# Altium PCB 1815C.PcbDoc
Units mm, origin at the board's own origin, x right, y up, seen from the top; angles counter-clockwise.
Board outline 170 x 100 mm, 2 copper layers (Top Layer, Bottom Layer), stack 1.586 mm thick; 85 components, 65 nets, 436 pads, 91 vias.
Unrouted connection lines stored in the file: 1.
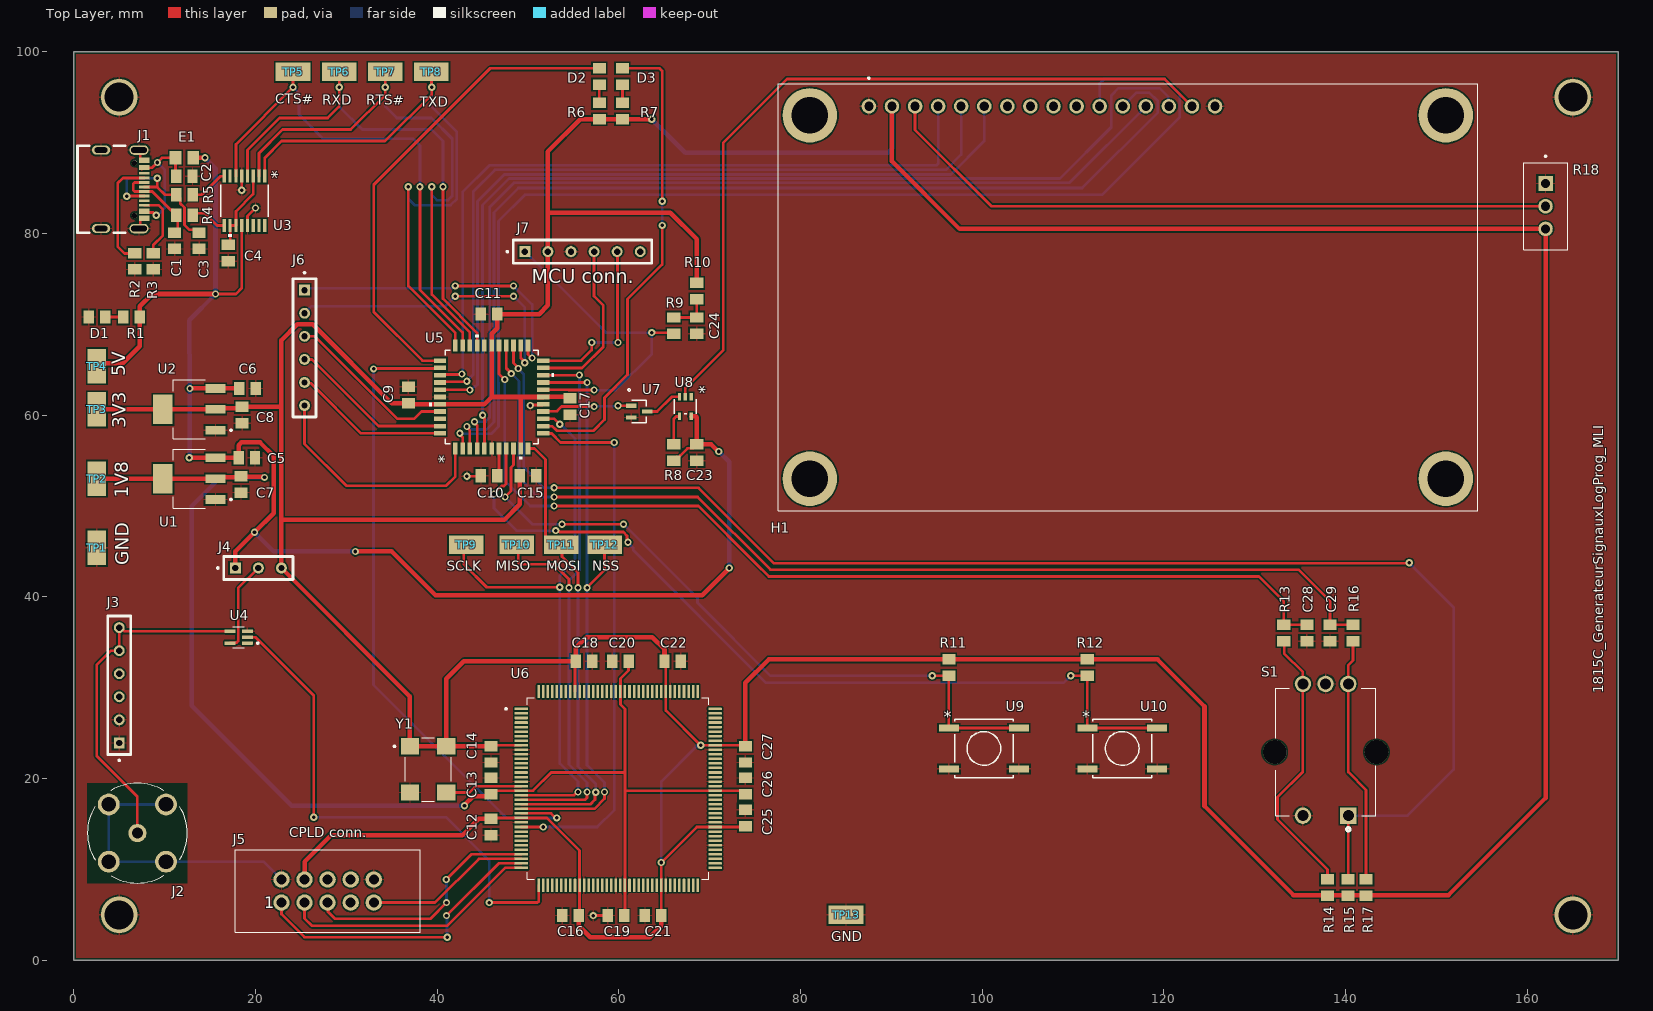
[diagram p0: Top Layer view]
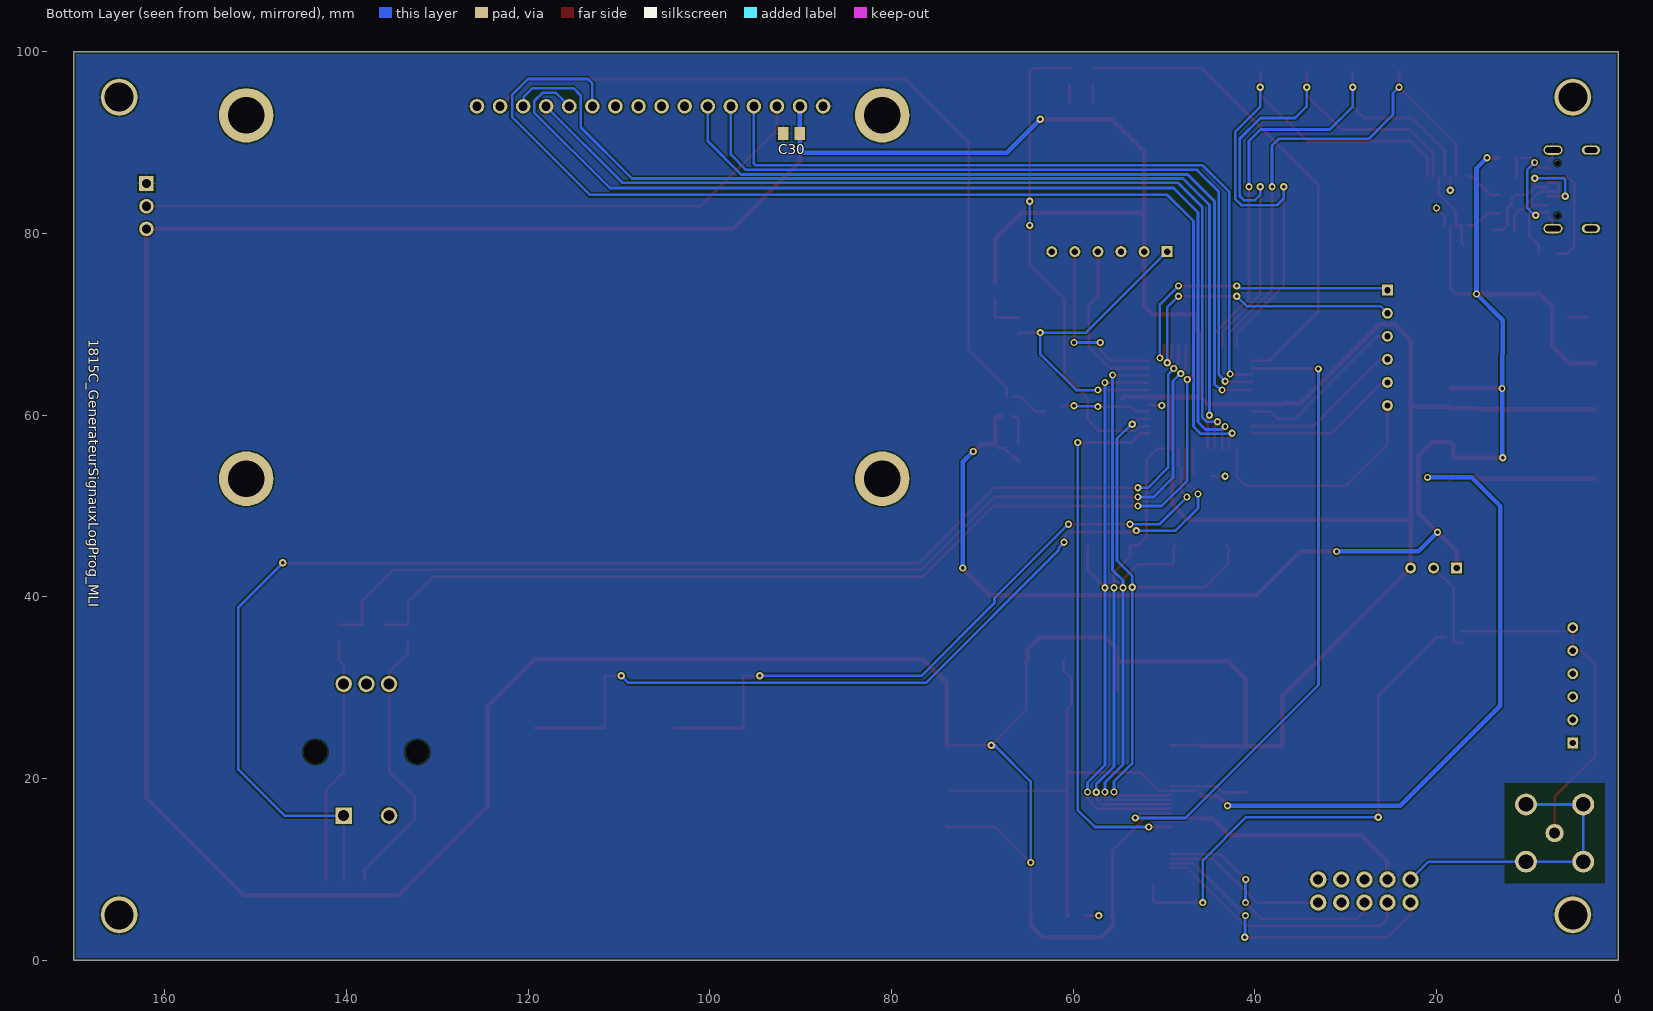
[diagram p1: Bottom Layer view, seen from below]
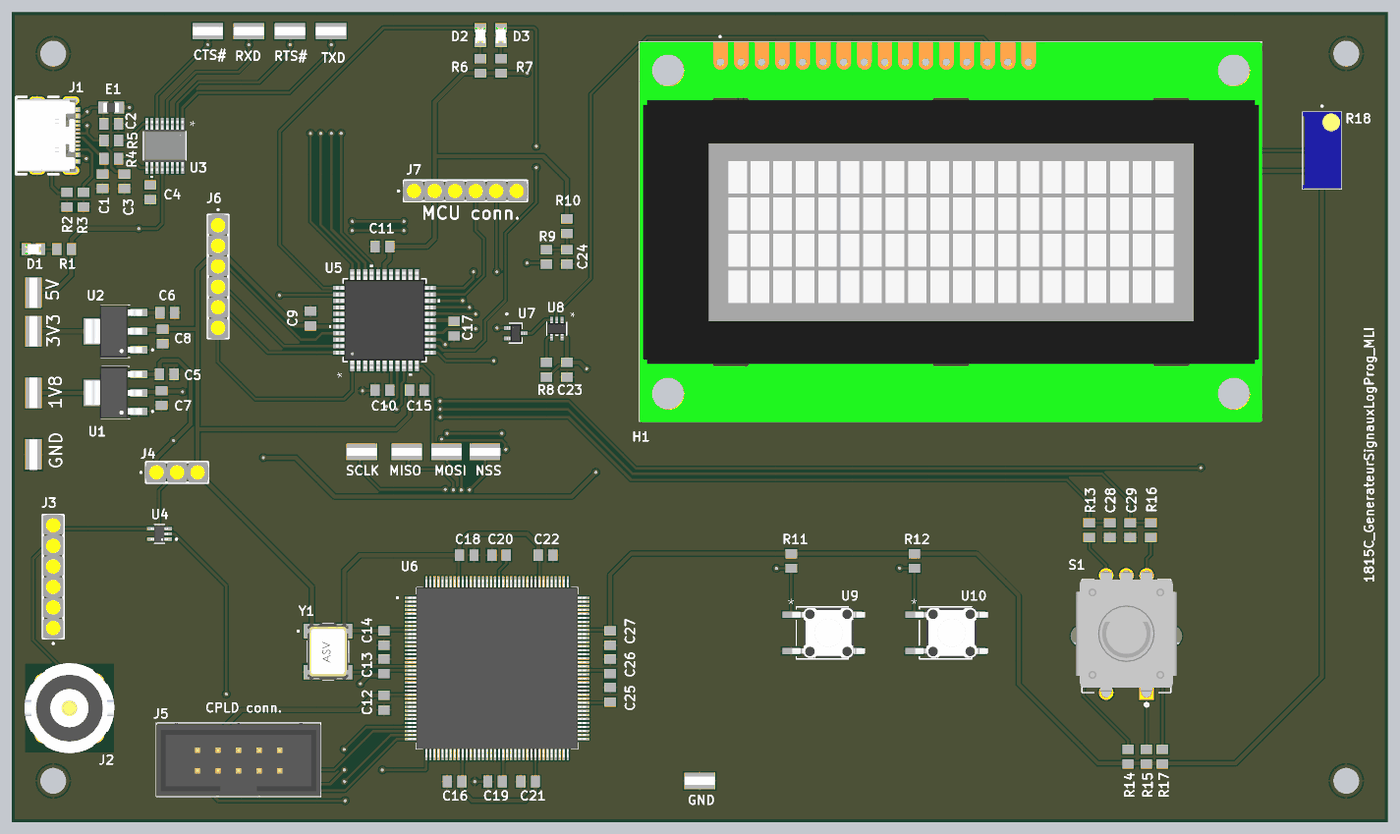
[diagram p2: 3D render of the assembled board from above, using the file's embedded part models]

## Layer stack, top to bottom
Top Solder: solder mask 0.0102, Solder Resist, Dk 3.5
Top Layer: signal copper 0.018
Dielectric1: core 1.55, FR-4, Dk 4.8
Bottom Layer: signal copper 0.018
Bottom Solder: solder mask 0.0102, Solder Resist, Dk 3.5

## Board outline
0,0 0,100 170,100 170,0

## Design rules (kind name [scope] priority, off if disabled: settings)
BoardOutlineClearance [All] p1: gap=0.25 ignorepadtopadclearanceinfootprint=FALSE except(0: Arc-SplitContinuation Track-SplitContinuation SMDPad-SplitContinuation THPad-SplitContinuation Via-SplitContinuation Fill-SplitContinuation Poly-SplitContinuation Region-SplitContinuation Text-SplitContinuation)
Clearance Clearance-xPP-xTP-xTT [All] p1: gap=0.16 ignorepadtopadclearanceinfootprint=FALSE
ComponentClearance [All] p1: gap=0.25 collisioncheckmode=3 verticalgap=0.25 showdistances=FALSE
DiffPairsRouting [All] p1: maxlimit=0.25 minlimit=0.25 mostfreqgap=0.25 toplayer_minwidth=0.3 toplayer_maxwidth=0.3 toplayer_prefwidth=0.3 bottomlayer_minwidth=0.3 bottomlayer_maxwidth=0.3 bottomlayer_prefwidth=0.3 maxuncoupledlength=12.5
Height [All] p1: minheight=0 maxheight=25 prefheight=12.5
HoleSize HoleSize-PTH [All] p1: absolutevalues=TRUE maxlimit=10 minlimit=0.25 maxpercent=80.000 minpercent=20.000
HoleToHoleClearance [All] p1: gap=0.35 allowstackedmicrovias=TRUE
MinimumAnnularRing "Minimum IAR  >0.45mm" [((ObjectKind = 'Pad') OR (ObjectKind = 'Via')) And (Layer = 'MultiLayer') And (HoleDiameter > AsMM(0.45))] p1: minimumring=0.175 // minimum inner annular ring for pads > 0.45mm finished hole size
MinimumSolderMaskSliver [All] p1: minsoldermaskwidth=0.08
PasteMaskExpansion [All] p1: expansion=-0.025
PlaneClearance PlaneClearance-IPI [All] p1: clearance=0.25
PlaneConnect [All] p1: planeconnectstyle=Relief reliefexpansion=0.175 reliefentries=4 reliefconductorwidth=0.2 reliefairgap=0.2
PolygonConnect PolygonConnect-xTW [All] p1: connectstyle=Relief reliefconductorwidth=0.2 reliefentries=4 polygonreliefangle="90 Angle" airgapwidth=0.2
RoutingCorners [All] p1: cornerstyle=45-Degree minsetback=2.5 maxsetback=2.5
RoutingVias RoutingViasES [All] p1: holewidth=0.4 width=0.8 viastyle="Through Hole" minholewidth=0.25 minwidth=0.61 maxholewidth=0.5 maxwidth=1 // finishet hole size <= 0.45mm
SilkToSilkClearance [All] p1: silktosilkclearance=0.2
SilkToSolderMaskClearance SilkscreenOverComponentPads [IsPad] p1: minsilkscreentomaskgap=0.2 clearancetoexposedcopper=TRUE
SolderMaskExpansion [All] p1: expansion=0 istentingtop=FALSE
UnRoutedNet [All] p1: checkbadconnections=TRUE
Width Width-xTW [All] p1: maxlimit=1.5 minlimit=0.25 preferedwidth=0.3
17 further rules are at their usual default settings.

## Classes and differential pairs
component class 1815C_USB_Alim: C1 C2 C3 C4 C5 C6 C7 C8 D1 E1 GND J1 R1 R2 R3 R4 R5 TP1 TP2 TP3 TP4 TP5 TP6 TP7 TP8 TP13 U1 U2 U3
component class 1815C_Microcontroleur: C9 C10 C11 C15 C17 C24 D2 D3 J6 J7 R6 R7 R9 R10 U5
component class 1815C_Interface_hardware: C23 C28 C29 C30 H1 R8 R11 R12 R13 R14 R15 R16 R17 R18 S1 U7 U8 U9 U10
component class 1815C_CPLD: C12 C13 C14 C16 C18 C19 C20 C21 C22 C25 C26 C27 J2 J3 J4 J5 TP9 TP10 TP11 TP12 U4 U6 Y1
differential pair FT230: +FT230_P -FT230_N

## Components (designator, comment, footprint, x,y, rotation, side; value= is the part's Value field where it differs from the comment)
C1 "Cap" 0805 11.1,79.2 r90 top value=47pF (schematic designator C4)
C2 "Cap" 0805 12.17,86.294 r180 top value=10nF (schematic designator C1)
C3 "Cap" 0805 13.8,79.2 r90 top value=47pF (schematic designator C5)
C4 "Cap" 0805 17,77.84 r270 top value=100nF (schematic designator C2)
C5 "Cap" 0805 19.05,55.32 r180 top value=22uF (schematic designator C8)
C6 "Cap" 0805 19.113,62.94 r180 top value=22uF
C7 "Cap" 0805 18.397,52.385 r90 top value=22uF (schematic designator C9)
C8 "Cap" 0805 18.53,60.005 r90 top value=22uF (schematic designator C7)
C9 "Cap" 0805 36.83,62.23 r270 top value=100nF (schematic designator C17)
C10 "Cap" 0805 45.72,53.34 r0 top value=10uF (schematic designator C18)
C11 "Cap" 0805 45.72,71.12 r0 top value=100nF (schematic designator C16)
C12 "Cap" 0805 45.92,14.67 r90 top value=100nF (schematic designator C25)
C13 "Cap" 0805 45.92,19.17 r270 top value=100nF (schematic designator C22)
C14 "Cap" 0805 45.92,22.67 r90 top value=100nF (schematic designator C26)
C15 "Cap" 0805 50,53.34 r180 top value=100nF (schematic designator C14)
C16 "Cap" 0805 54.67,4.92 r0 top value=100nF (schematic designator C29)
C17 "Cap" 0805 54.61,60.96 r90 top value=100nF (schematic designator C15)
C18 "Cap" 0805 56.17,32.92 r180 top value=100nF (schematic designator C23)
C19 "Cap" 0805 59.67,4.92 r0 top value=100nF
C20 "Cap" 0805 60.17,32.92 r0 top value=100nF (schematic designator C21)
C21 "Cap" 0805 63.77,4.92 r0 top value=100nF (schematic designator C30)
C22 "Cap" 0805 65.92,32.92 r180 top value=100nF (schematic designator C24)
C23 "Cap" 0805 68.58,55.88 r90 top value=100nF (schematic designator C31)
C24 "Cap" 0805 68.58,69.85 r90 top value=100nF (schematic designator C13)
C25 "Cap" 0805 73.92,15.67 r270 top value=100nF (schematic designator C28)
C26 "Cap" 0805 73.92,19.17 r270 top value=100nF (schematic designator C20)
C27 "Cap" 0805 73.92,22.67 r90 top value=100nF
C28 "Cap" 0805 135.73,36.02 r270 top value=10nF (schematic designator C11)
C29 "Cap" 0805 138.27,36.02 r270 top value=10nF (schematic designator C12)
C30 "Cap" 0805 91,91 r180 bottom value=100nF (schematic designator C10)
D1 "150080RS75000" "0805 - LED" 2.54,70.8 r0 top
D2 "150080RS75000" "0805 - LED" 57.85,97.29 r270 top
D3 "150080RS75000" "0805 - LED" 60.39,97.29 r270 top
E1 "MI0805K601R-10" FB_MI0805K601R-10 12.17,88.326 r0 top
H1 "NHD-0420AZ-FSW-GBW-33V3" NHD0420AZFSWGBW33V3 87.52,94 r0 top
J1 "CONN RCP USB2.0 TYP C" GCT_USB4105-GF-A 3,84.865 r270 top
J2 "CONBNC001" LINX_CONBNC001 7,14 r0 top (schematic designator J6)
J3 "Berg 6" SAMTEC_TS-106-G-A 5,30.27 r90 top (schematic designator J7)
J4 "Berg 3" SAMTEC_TS-103-G-A 20.32,43.18 r0 top (schematic designator J5)
J5 "61201021621" 61201021621 27.94,7.62 r0 top (schematic designator J4)
J6 "Berg 6" SAMTEC_TS-106-G-A 25.4,67.41 r270 top (schematic designator J3)
J7 "Berg 6" SAMTEC_TS-106-G-A 56,78 r0 top (schematic designator J2)
R1 "Res2" 0805 6.35,70.8 r0 top value=220R (schematic designator R5)
R2 "Res2" 0805 6.713,76.94 r90 top value=5k1 (schematic designator R4)
R3 "Res2" 0805 8.749,76.94 r90 top value=5k1
R4 "Res2" 0805 12.177,82.007 r180 top value=27R (schematic designator R2)
R5 "Res2" 0805 12.192,84.262 r180 top value=27R (schematic designator R1)
R6 "Res2" 0805 57.85,93.48 r270 top value=100R (schematic designator R17)
R7 "Res2" 0805 60.39,93.48 r270 top value=100R (schematic designator R18)
R8 "Res2" 0805 66.04,55.88 r90 top value=39R
R9 "Res2" 0805 66.04,69.85 r90 top value=1k (schematic designator R16)
R10 "Res2" 0805 68.58,73.66 r90 top value=10k (schematic designator R15)
R11 "Res2" 0805 96.322,32.21 r270 top value=10k (schematic designator R6)
R12 "Res2" 0805 111.562,32.21 r270 top value=10k (schematic designator R7)
R13 "Res2" 0805 133.19,36.02 r90 top value=10k (schematic designator R14)
R14 "Res2" 0805 138,8 r90 top value=10k (schematic designator R12)
R15 "Res2" 0805 140.25,8 r90 top value=10k (schematic designator R10)
R16 "Res2" 0805 140.81,36.02 r90 top value=10k (schematic designator R13)
R17 "Res2" 0805 142.25,8 r90 top value=10k (schematic designator R11)
R18 "PV36W103C01B00" TRIM_PV36W103C01B00 162,83 r270 top value=10k (schematic designator R9)
S1 "PEC12R-4025F-S0024" ENC_PEC12R-4025F-S0024 137.79,22.92 r270 top
TP1 "5019" KEYSTONE_5019 2.54,45.4 r90 top (schematic designator TP7)
TP2 "5019" KEYSTONE_5019 2.54,53.02 r90 top (schematic designator TP9)
TP3 "5019" KEYSTONE_5019 2.54,60.64 r90 top (schematic designator TP6)
TP4 "5019" KEYSTONE_5019 2.54,65.405 r90 top (schematic designator TP5)
TP5 "5019" KEYSTONE_5019 24.13,97.79 r0 top (schematic designator TP4)
TP6 "5019" KEYSTONE_5019 29.21,97.79 r0 top (schematic designator TP1)
TP7 "5019" KEYSTONE_5019 34.29,97.79 r0 top (schematic designator TP3)
TP8 "5019" KEYSTONE_5019 39.37,97.79 r0 top (schematic designator TP2)
TP9 "5019" KEYSTONE_5019 43.18,45.72 r180 top (schematic designator TP10)
TP10 "5019" KEYSTONE_5019 48.75,45.72 r180 top (schematic designator TP11)
TP11 "5019" KEYSTONE_5019 53.67,45.72 r180 top (schematic designator TP12)
TP12 "5019" KEYSTONE_5019 58.42,45.72 r180 top (schematic designator TP13)
TP13 "5019" KEYSTONE_5019 85,5 r180 top (schematic designator TP8)
U1 "1V8" VREG_LM1117MPX 12.7,53.02 r180 top (schematic designator U3)
U2 "3V3" VREG_LM1117MPX 12.7,60.64 r180 top
U3 "FT230X" SOIC_30XS-R_FTD 18.796,83.591 r270 top (schematic designator U1)
U4 "SN74LV1T34DCKR" SOT65P210X110-5N 18.15,35.56 r180 top (schematic designator U10)
U5 "PIC32MX230F256D-I/PT" TQFP44_PT_MCH 46,62 r90 top (schematic designator U8)
U6 "5M1270ZT144C5N" QFP50P2200X2200X160-144N 59.92,18.92 r0 top (schematic designator U9)
U7 "PDTC124XU,115" SOT323_NXP 62.23,60.4 r270 top (schematic designator U6)
U8 "PSSI2021SAY,115" SOT353_NXP 67.31,60.96 r270 top (schematic designator U5)
U9 "SWITCH TACTILE SPST-NO 0.05A 12V" SOIC_82043816_WRE 100.17,23.32 r0 top (schematic designator U4)
U10 "SWITCH TACTILE SPST-NO 0.05A 12V" SOIC_82043816_WRE 115.41,23.32 r0 top (schematic designator U7)
Y1 "ASV50000MHZEJT" XTAL_ASV50000MHZEJT 39,21 r0 top

## Footprints (in the part's own frame and the unit in brackets; to place one, negate y for a bottom-side part, rotate by r counter-clockwise, add the part's x,y. Pads: shape width x height; smd on the part's side, far side on the other; paste and mask are expansions set on the pad)
0805 [mm]
  rect 1.15x1.45 smd: 1(-0.9,0) 2(0.9,0)
  body extent -1.01,-0.6 0.99,0.6, height 1.35
"0805 - LED" [mm]
  rect 1.15x1.45 smd: 1(-0.9,0) 2(0.9,0)
  body extent -1,-0.63 1,0.63, height 0.7
61201021621 [mm]
  round 1.8 hole 1.1: 1(-5.08,-1.27) 2(-5.08,1.27) 3(-2.54,-1.27) 4(-2.54,1.27) 5(0,-1.27) 6(0,1.27) 7(2.54,-1.27) 8(2.54,1.27) 9(5.08,-1.27) 10(5.08,1.27)
  silkscreen extent -10.18,-4.55 10.18,4.55, body extent -10.18,-4.53 10.18,4.57, height 9.1
ENC_PEC12R-4025F-S0024 [mm]
  rect 1.8x1.8 hole 1.2: 1(7,2.5)
  round 1.8 hole 1.2: 2(7,-2.5) A(-7.5,2.5) B(-7.5,-2.5) C(-7.5,0)
  round 2.6 hole 2.6 unplated: ""(0,5.6) ""(0,-5.6)
  silkscreen extent -7,-5.5 8.7,5.5, body extent -7.89,-7 6.86,7, height 20
FB_MI0805K601R-10 [mm]
  rect 1.285x1.47 smd: 1(-0.973,0) 2(0.973,0)
  body extent -1,-0.63 1,0.63, height 1.1
GCT_USB4105-GF-A [mm]
  rect 0.6x1.15 smd: A1_B12(-3.2,4.755) A4_B9(-2.4,4.755) B1_A12(3.2,4.755) B4_A9(2.4,4.755)
  rect 0.3x1.15 smd: A5(-1.25,4.755) A6(-0.25,4.755) A7(0.25,4.755) A8(1.25,4.755) B5(1.75,4.755) B6(0.75,4.755) B7(-0.75,4.755) B8(-1.75,4.755)
  oval 1.05x2.1 hole 0.6 slot 1.7 at 90 deg: S1(-4.32,4.18) S4(4.32,4.18)
  oval 1x2 hole 0.6 slot 1.4 at 90 deg: S2(-4.32,0) S3(4.32,0)
  round 0.6 hole 0.6 unplated: ""(-2.89,3.68) ""(2.89,3.68)
  silkscreen extent -4.79,-2.6 4.79,2.65, body extent -4.47,-2.59 4.47,5.11, height 3.26
KEYSTONE_5019 [mm]
  rect 3.8x2.03 smd: TP(0,0)
  body extent -1.91,-1.01 1.91,1.01, height 1.14
LINX_CONBNC001 [mm]
  round 2 hole 1.2: 1(0,0)
  round 2.4 hole 1.6: 2(-3.15,-3.15) 2(-3.15,3.15) 2(3.15,-3.15) 2(3.15,3.15)
  silkscreen extent -5.5,-5.5 5.5,5.5, body extent -5.5,-5.5 5.5,5.5, height 13.9
NHD0420AZFSWGBW33V3 [mm]
  round 1.6 hole 1: 1(0,0) 2(2.54,0) 3(5.08,0) 4(7.62,0) 5(10.16,0) 6(12.7,0) 7(15.24,0) 8(17.78,0) 9(20.32,0) 10(22.86,0) 11(25.4,0) 12(27.94,0) 13(30.48,0) 14(33.02,0) 15(35.56,0) 16(38.1,0)
  round 6 hole 4: MH1(-6.5,-1) MH2(-6.5,-41) MH3(63.5,-41) MH4(63.5,-1)
  silkscreen extent -10,-44.5 67,3.2, body extent -9.93,-44.59 67.08,2.41, height 11.1
QFP50P2200X2200X160-144N [mm]
  rrect25% 1.47x0.28 smd: 1(-10.67,8.75) 2(-10.67,8.25) 3(-10.67,7.75) 4(-10.67,7.25) 5(-10.67,6.75) 6(-10.67,6.25) 7(-10.67,5.75) 8(-10.67,5.25) 9(-10.67,4.75) 10(-10.67,4.25) 11(-10.67,3.75) 12(-10.67,3.25) 13(-10.67,2.75) 14(-10.67,2.25) 15(-10.67,1.75) 16(-10.67,1.25) 17(-10.67,0.75) 18(-10.67,0.25) 19(-10.67,-0.25) 20(-10.67,-0.75) 21(-10.67,-1.25) 22(-10.67,-1.75) 23(-10.67,-2.25) 24(-10.67,-2.75) 25(-10.67,-3.25) 26(-10.67,-3.75) 27(-10.67,-4.25) 28(-10.67,-4.75) 29(-10.67,-5.25) 30(-10.67,-5.75) 31(-10.67,-6.25) 32(-10.67,-6.75) 33(-10.67,-7.25) 34(-10.67,-7.75) 35(-10.67,-8.25) 36(-10.67,-8.75) 73(10.67,-8.75) 74(10.67,-8.25) 75(10.67,-7.75) 76(10.67,-7.25) 77(10.67,-6.75) 78(10.67,-6.25) 79(10.67,-5.75) 80(10.67,-5.25) 81(10.67,-4.75) 82(10.67,-4.25) 83(10.67,-3.75) 84(10.67,-3.25) 85(10.67,-2.75) 86(10.67,-2.25) 87(10.67,-1.75) 88(10.67,-1.25) 89(10.67,-0.75) 90(10.67,-0.25) 91(10.67,0.25) 92(10.67,0.75) 93(10.67,1.25) 94(10.67,1.75) 95(10.67,2.25) 96(10.67,2.75) 97(10.67,3.25) 98(10.67,3.75) 99(10.67,4.25) 100(10.67,4.75) 101(10.67,5.25) 102(10.67,5.75) 103(10.67,6.25) 104(10.67,6.75) 105(10.67,7.25) 106(10.67,7.75) 107(10.67,8.25) 108(10.67,8.75)
  rrect25% 0.28x1.47 smd: 37(-8.75,-10.67) 38(-8.25,-10.67) 39(-7.75,-10.67) 40(-7.25,-10.67) 41(-6.75,-10.67) 42(-6.25,-10.67) 43(-5.75,-10.67) 44(-5.25,-10.67) 45(-4.75,-10.67) 46(-4.25,-10.67) 47(-3.75,-10.67) 48(-3.25,-10.67) 49(-2.75,-10.67) 50(-2.25,-10.67) 51(-1.75,-10.67) 52(-1.25,-10.67) 53(-0.75,-10.67) 54(-0.25,-10.67) 55(0.25,-10.67) 56(0.75,-10.67) 57(1.25,-10.67) 58(1.75,-10.67) 59(2.25,-10.67) 60(2.75,-10.67) 61(3.25,-10.67) 62(3.75,-10.67) 63(4.25,-10.67) 64(4.75,-10.67) 65(5.25,-10.67) 66(5.75,-10.67) 67(6.25,-10.67) 68(6.75,-10.67) 69(7.25,-10.67) 70(7.75,-10.67) 71(8.25,-10.67) 72(8.75,-10.67) 109(8.75,10.67) 110(8.25,10.67) 111(7.75,10.67) 112(7.25,10.67) 113(6.75,10.67) 114(6.25,10.67) 115(5.75,10.67) 116(5.25,10.67) 117(4.75,10.67) 118(4.25,10.67) 119(3.75,10.67) 120(3.25,10.67) 121(2.75,10.67) 122(2.25,10.67) 123(1.75,10.67) 124(1.25,10.67) 125(0.75,10.67) 126(0.25,10.67) 127(-0.25,10.67) 128(-0.75,10.67) 129(-1.25,10.67) 130(-1.75,10.67) 131(-2.25,10.67) 132(-2.75,10.67) 133(-3.25,10.67) 134(-3.75,10.67) 135(-4.25,10.67) 136(-4.75,10.67) 137(-5.25,10.67) 138(-5.75,10.67) 139(-6.25,10.67) 140(-6.75,10.67) 141(-7.25,10.67) 142(-7.75,10.67) 143(-8.25,10.67) 144(-8.75,10.67)
  silkscreen extent -12.44,-10 10,10, body extent -11,-11 11,11, height 1.6
SAMTEC_TS-103-G-A [mm]
  rect 1.2x1.2 hole 0.7: 1(-2.54,0)
  round 1.2 hole 0.7: 2(0,0) 3(2.54,0)
  silkscreen extent -4.56,-1.27 3.81,1.27, body extent -3.91,-1.27 3.91,1.27, height 8.28
SAMTEC_TS-106-G-A [mm]
  rect 1.2x1.2 hole 0.7: 1(-6.35,0)
  round 1.2 hole 0.7: 2(-3.81,0) 3(-1.27,0) 4(1.27,0) 5(3.81,0) 6(6.35,0)
  silkscreen extent -8.37,-1.27 7.62,1.27, body extent -7.72,-1.27 7.72,1.27, height 8.28
SOIC_30XS-R_FTD [mil]
  rect 57.28x13.97 smd paste+0 mask+0: 1(-107.14,87.5) 2(-107.14,62.5) 3(-107.14,37.5) 4(-107.14,12.5) 5(-107.14,-12.5) 6(-107.14,-37.5) 7(-107.14,-62.5) 8(-107.14,-87.5) 9(107.14,-87.5) 10(107.14,-62.5) 11(107.14,-37.5) 12(107.14,-12.5) 13(107.14,12.5) 14(107.14,37.5) 15(107.14,62.5) 16(107.14,87.5)
  silkscreen extent -69,-104 156,104, body extent -122,-99 122,99, height 69
SOIC_82043816_WRE [mm]
  rect 2.199x0.771 smd paste+0 mask+0: 1(-3.848,2.25) 2(-3.848,-2.25) 3(3.848,2.25) 4(3.848,-2.25)
  silkscreen extent -3.23,-3.23 3.23,3.23, body extent -3.74,-3.1 5.26,3.1, height 4.3
SOT65P210X110-5N [mm]
  rrect25% 1.19x0.4 smd: 1(-0.96,0.65) 2(-0.96,0) 3(-0.96,-0.65) 4(0.96,-0.65) 5(0.96,0.65)
  silkscreen extent -2.2,-1.17 0.63,1.17, body extent -1.05,-1 1.05,1, height 1.1
SOT323_NXP [mil]
  rect 18.36x45.56 smd paste+0 mask+0: 1(-25.59,-34.5) 2(25.59,-34.5) 3(0,34.5)
  silkscreen extent -98,-48 49,32, body extent -44,-44 44,44, height 44
SOT353_NXP [mm]
  rect 0.794x0.355 smd paste+0 mask+0: 1(-1.07,0.65) 2(-1.07,0) 3(-1.07,-0.65) 4(1.07,-0.65) 5(1.07,0.65)
  silkscreen extent -0.8,-1.23 0.8,1.23, body extent -1.12,-1.1 1.12,1.1, height 1.09
TQFP44_PT_MCH [mm]
  rect 1.341x0.507 smd paste+0 mask+0: 1(-5.674,4) 2(-5.674,3.2) 3(-5.674,2.4) 4(-5.674,1.6) 5(-5.674,0.8) 6(-5.674,0) 7(-5.674,-0.8) 8(-5.674,-1.6) 9(-5.674,-2.4) 10(-5.674,-3.2) 11(-5.674,-4) 23(5.674,-4) 24(5.674,-3.2) 25(5.674,-2.4) 26(5.674,-1.6) 27(5.674,-0.8) 28(5.674,0) 29(5.674,0.8) 30(5.674,1.6) 31(5.674,2.4) 32(5.674,3.2) 33(5.674,4)
  rect 0.507x1.341 smd paste+0 mask+0: 12(-4,-5.674) 13(-3.2,-5.674) 14(-2.4,-5.674) 15(-1.6,-5.674) 16(-0.8,-5.674) 17(0,-5.674) 18(0.8,-5.674) 19(1.6,-5.674) 20(2.4,-5.674) 21(3.2,-5.674) 22(4,-5.674) 34(4,5.674) 35(3.2,5.674) 36(2.4,5.674) 37(1.6,5.674) 38(0.8,5.674) 39(0,5.674) 40(-0.8,5.674) 41(-1.6,5.674) 42(-2.4,5.674) 43(-3.2,5.674) 44(-4,5.674)
  silkscreen extent -6.85,-6.85 6.85,6.85, body extent -5.99,-5.99 5.99,5.99, height 1.2
TRIM_PV36W103C01B00 [mm]
  rect 1.6x1.6 hole 1: 1(-2.5,0)
  round 1.6 hole 1: 2(0,0) 3(2.5,0)
  silkscreen extent -5.6,-2.41 4.76,2.42, body extent -4.76,-2.41 4.76,2.42, height 11.55
VREG_LM1117MPX [mm]
  rect 2.15x0.95 smd: 1(-2.9,2.3) 2(-2.9,0) 3(-2.9,-2.3)
  rect 2.15x3.25 smd: 4(2.9,0)
  silkscreen extent -4.7,-3.25 1.75,3.25, body extent -3.3,-3.25 3.7,3.25, height 1.8
XTAL_ASV50000MHZEJT [mm]
  rect 2x1.8 smd: 1(-2,2.54) 2(-2,-2.54) 3(2,-2.54) 4(2,2.54)
  silkscreen extent -3.8,-3.5 2.54,3.5, body extent -2.54,-3.5 2.54,3.5, height 1.81

## Part data
C1 C2 C3 C4 C5 C6 C7 C8 C9 C10 C11 C12 C13 C14 C15 C16 C17 C18 C19 C20 C21 C22 C23 C24 C25 C26 C27 C28 C29 C30: "Capacitor", LatestRevisionDate=17-Jul-2002, LatestRevisionNote="Re-released for DXP Platform.", PackageDescription="Radial Cap, Thru-Hole; 2 Leads; 0.3 in Pin Spacing", PackageReference=RAD-0.3, Published=8-Jun-2000, Publisher="Altium Limited"
D1 D2 D3: library part LED, "LED RED CLEAR 0805 SMD", Supplier Part Number 1=732-4984-1-ND, LatestRevisionDate=08-Jul-2005, LatestRevisionNote="Mech Layer 1 removed.", PackageDescription="LED; 2 Leads", PackageReference=LED-0, Published=8-Jun-2000, Publisher="Altium Limited", Supplier 1=Digi-Key
E1: "600 Ohms @ 100MHz 1 Power Line Ferrite Bead 0805 (2012 Metric) 1.5A 100mOhm", Package="0805 Laird", Supplier Part Number 1=240-2390-1-ND, Availability=Warning, Check_prices=https://www.snapeda.com/parts/MI0805K601R-10/Laird-Signal%20Integrity%20Products/view-part/332699/?ref=eda, MF="Laird-Signal Integrity", MP=MI0805K601R-10, Price=None, Purchase-URL=https://pricing.snapeda.com/search/part/MI0805K601R-10/?ref=eda, SnapEDA_Link=https://www.snapeda.com/parts/MI0805K601R-10/Laird-Signal%20Integrity%20Products/view-part/332699/?ref=snap, Supplier 1=Digi-Key
H1: "LCD Character Display Modules & Accessories STN- GRAY Transfl 77.5 x 47.0", Manufacturer_Name="Newhaven Display", Mouser Part Number=763-0420AZFSWGBW33V3, Supplier Part Number 1=NHD-0420AZ-FSW-GBW-33V3-ND, Allied Price/Stock=https://www.alliedelec.com/newhaven-display-international-nhd-0420az-fsw-gbw-33v3/70518142/, Allied_Number=70518142, Datasheet Link=http://www.newhavendisplay.com/specs/NHD-0420AZ-FSW-GBW-33V3.pdf, Geometry.Height=14.5mm, Manufacturer_Part_Number=NHD-0420AZ-FSW-GBW-33V3, Mouser Price/Stock=https://www.mouser.com/Search/Refine.aspx?Keyword=763-0420AZFSWGBW33V3, Supplier 1=Digi-Key
J1: library part USB4105-GF-A, "USB-C (USB TYPE-C) USB 2.0 Receptacle Connector 24 (16+8 Dummy) Position Surface Mount, Right Angle; Through Hole", Package=None, Supplier Part Number 1=3158113, Availability="In Stock", Check_prices=https://www.snapeda.com/parts/USB4105-GF-A/Global+Connector+Technology/view-part/?ref=eda, MF=GCT, MP=USB4105-GF-A, Price=None, Purchase-URL=https://pricing.snapeda.com/search/part/USB4105-GF-A/?ref=eda, SnapEDA_Link=https://www.snapeda.com/parts/USB4105-GF-A/Global+Connector+Technology/view-part/?ref=snap, Supplier 1="Future Electronics"
J2: "BNC Connector Jack, Female Socket 50Ohm Through Hole Solder", Package=None, Supplier Part Number 1=343-CONBNC001-ND, Availability="In Stock", Check_prices=https://www.snapeda.com/parts/CONBNC001/Linx/view-part/?ref=eda, MF="Linx Technologies Inc.", MP=CONBNC001, Price=None, Purchase-URL=https://pricing.snapeda.com/search/part/CONBNC001/?ref=eda, SnapEDA_Link=https://www.snapeda.com/parts/CONBNC001/Linx/view-part/?ref=snap, Supplier 1=Digi-Key
J3 J6 J7: "Berge 6 pins"
J4: "Berge 3 pins"
J5: "Connector Header Through Hole 10 position 0.100 _2.54mm_", Package=None, Supplier Part Number 1=732-2094-ND, Availability=Unavailable, MF="Wurth Electronics", MP=61201021621, Price=None, SnapEDA_Link=https://www.snapeda.com/parts/61201021621/Wurth%20Electronics%20Inc./view-part/1156232/?ref=snap, Supplier 1=Digi-Key
R1 R2 R3 R4 R5 R6 R7 R8 R9 R10 R11 R12 R13 R14 R15 R16 R17: library part Res, "Resistor", LatestRevisionDate=17-Jul-2002, LatestRevisionNote="Re-released for DXP Platform.", PackageDescription="Axial Device, Thru-Hole; 2 Leads; 0.4 in Pin Spacing", PackageReference=AXIAL-0.4, Published=8-Jun-2000, Publisher="Altium Limited"
R18: library part trimmer, "10 kOhms 0.5W, 1/2W PC Pins Through Hole Trimmer Potentiometer Cermet 25.0 Turn Top Adjustment", Manufacturer_Name=PIHER, Manufacturer_Part_Number=PT10MH01-105A2020, Mouser Part Number=531-PT10MH-1M, Supplier Part Number 1=118-PV36W103C01B00-ND, Datasheet Link=https://componentsearchengine.com/Datasheets/1/PT10MH01-105A2020.pdf, Geometry.Height=12.3mm, Mouser Price/Stock=https://www.mouser.com/Search/Refine.aspx?Keyword=531-PT10MH-1M, Supplier 1=Digi-Key
S1: "Encoder 12mm 0detents 20mm Shft Push Momentry Sw 24 Pulse", Package=None, Supplier Part Number 1=PEC12R-4222F-S0024-ND, Availability=Unavailable, MP=PEC12R-4025F-S0024, Price=None, Supplier 1=Digi-Key
TP1 TP2 TP3 TP4 TP5 TP6 TP7 TP8 TP9 TP10 TP11 TP12 TP13: "SMT Test Point- Mininature-1000 pc Reels", Package=None, Supplier Part Number 1=36-5019CT-ND, Availability="In Stock", MF="Keystone Electronics", MP=5019, Price=None, Purchase-URL=https://pricing.snapeda.com/search/part/5019/?ref=eda, Supplier 1=Digi-Key
U1: library part LM1117MPX-1.8/NOPB, "800-mA 15-V linear voltage regulator 4-SOT-223 0 to 125", Package=None, Supplier Part Number 1=LM1117MPX-1.8/NOPBCT-ND, Availability=Unavailable, MP=LM1117MPX-1.8, Price=None, Supplier 1=Digi-Key
U2: library part LM1117MPX-3.3/NOPB, "800-mA 15-V linear voltage regulator 4-SOT-223 0 to 125", Package="SOT-223-4 Texas Instruments", Supplier Part Number 1=LM1117MPX-3.3/NOPBCT-ND, Digi-Key_Part_Number=LM1117MPX-3.3/NOPBCT-ND, DigiKey-Purchase-URL=https://snapeda.com/shop?store=DigiKey&id=78945, MF="Texas Instruments", Mouser-Purchase-URL=https://snapeda.com/shop?store=Mouser&id=78945, MP=LM1117MPX-3.3/NOPB, SnapEDA_Link=https://www.snapeda.com/parts/LM1117MPX-3.3/NOPB/Texas%20Instruments/view-part/78945/?ref=snap, Supplier 1=Digi-Key, Texas_Instruments-Purchase-URL=https://snapeda.com/shop?store=Texas+Instruments&id=78945
U3: library part FT230XS-R, "USB Pont, USB à UART USB 2.0 UART Interface 16-SSOP", Mfr_Name="FTDI, Future Technology Devices International Ltd", Supplier Part Number 1=7570010P, Digi-Key_Part_Number_1=768-1135-2-ND, Digi-Key_Part_Number_2=768-1135-1-ND, Digi-Key_Part_Number_3=768-1135-6-ND, RefDes=RefDes, Supplier 1=Rs, Type=Type
U4: "Single Power Supply BUFFER Logic Level Shifter (no enable) 5-SC70 -40 to 125", Package="SOT-SC70-5 Texas Instruments", Supplier Part Number 1=296-37177-1-ND, Digi-Key_Part_Number=296-37177-1-ND, MF="Texas Instruments", MP=SN74LV1T34DCKR, SnapEDA_Link=https://www.snapeda.com/parts/SN74LV1T34DCKR/Texas%20Instruments/view-part/424277/?ref=snap, Supplier 1=Digi-Key, Texas_Instruments-Purchase-URL=https://snapeda.com/shop?store=Texas+Instruments&id=424277
U5: "MIPS32® M4K™ PIC® 32MX Microcontroller IC 32-Bit Single-Core 40MHz 256KB (256K x 8) FLASH 44-TQFP (10x10)", Mfr_Name=Microchip, Supplier Part Number 1=PIC32MX230F256D-I/PT-ND, RefDes=RefDes, Supplier 1=Digi-Key, Type=Type
U6: "IC CPLD 980MC 6.2NS 144TQFP", Package="TQFP-144 Altera", Supplier Part Number 1=544-2840-ND, Availability="In Stock", Check_prices=https://www.snapeda.com/parts/5M1270ZT144C5N/Intel/view-part/?ref=eda, MF=Intel, MP=5M1270ZT144C5N, Price=None, Purchase-URL=https://pricing.snapeda.com/search/part/5M1270ZT144C5N/?ref=eda, SnapEDA_Link=https://www.snapeda.com/parts/5M1270ZT144C5N/Intel/view-part/?ref=snap, Supplier 1=Digi-Key
U7: library part PDTC124XU, "Pre-Biased Bipolar Transistor (BJT) NPN - Pre-Biased 50 V 100 mA 200 mW Surface Mount SOT-323", Mfr_Name=NXP, Supplier Part Number 1=1727-1711-1-ND, Digi-Key_Part_Number_1=568-11253-1-ND, Digi-Key_Part_Number_2=568-11253-6-ND, Digi-Key_Part_Number_3=568-11253-2-ND, RefDes=RefDes, Supplier 1=Digi-Key, Type=Type
U8: "Current Source Regulator 50mA 5-TSSOP", Mfr_Name=NXP, Supplier Part Number 1=1727-4328-1-ND, Digi-Key_Part_Number_1=1727-4328-2-ND, Digi-Key_Part_Number_2=1727-4328-6-ND, RefDes=RefDes, Supplier 1=Digi-Key, Type=Type
U9 U10: library part 430182043816, "Interrupteur tactile SPST-NO Actionneur supérieur Montage en surface", Mfr_Name="Wurth Electronics", Supplier Part Number 1=732-7004-1-ND, Digi-Key_Part_Number_1=732-7004-2-ND, Digi-Key_Part_Number_2=732-7004-1-ND, Digi-Key_Part_Number_3=732-7004-6-ND, RefDes=RefDes, Supplier 1=Digi-Key, Type=Type
Y1: "Oscillator XO 50MHz Â±20ppm 15pF HCMOS 60% 3.3V 4-Pin SMD T/R", Package=None, Supplier Part Number 1=535-9330-1-ND, Check_prices=https://www.snapeda.com/parts/ASV50000MHZEJT/Abracon/view-part/?ref=eda, MF=Abracon, MP=ASV50000MHZEJT, SnapEDA_Link=https://www.snapeda.com/parts/ASV50000MHZEJT/Abracon/view-part/?ref=snap, Supplier 1=Digi-Key

## Via types
v1: diameter 0.8, hole 0.4, Top Layer to Bottom Layer, tented both sides, 86 vias
v2: diameter 4, hole 3.2, Top Layer to Bottom Layer, 4 vias
v3: diameter 0.8, hole 0.4, Top Layer to Bottom Layer, 1 vias

## Nets (pads, with @x,y where several pads share a name; then routed paths per layer and width w, separated by ;. In a path a pad name is that pad's centre, name@x,y a point inside that pad or via, vN(x,y) a via of type N, cw(c..) or ccw(c..) an arc to the next point about the centre after c; other vN are vias at no path point)
1V8: C7.2 C13.2 C19.2 C20.2 C26.2 TP2.TP U1.2 U1.4 U6.19 U6.56 U6.90 U6.126 | length 144.8
  Top Layer w0.3: C13.2@46.32,18.67 U6.19 50.553,18.67 52.553,20.67 60.67,20.67 ; C19.2@60.67,5.02 U6.56 60.67,18.67 ; C20.2@61.07,32.92 61.07,31.9 60.17,31 U6.126 60.17,28.17 60.67,27.67 60.67,20.67 ; C26.2@73.52,18.67 60.67,18.67 ; 60.67,18.67 60.67,20.67
  Top Layer w0.5: TP2.TP U1.4 U1.2 15.733,53.152 18.397,53.152 C7.2@18.464,53.219 ; C7.2 C7.2@18.464,53.219 ; v1(21,53.152) 20.943,53.21 18.852,53.21 18.662,53.02 C7.2@18.464,53.219 ; v1(43,17.019) 43,17.1 43.957,18.057 45.707,18.057 C13.2 ; C19.2 C19.2@60.67,5.02
  Bottom Layer w0.5: v1(21,53.152) 16.149,53.152 13,50.004 13,28 23.981,17.019 v1(43,17.019)
3V3: C8.2 C9.2 C11.2 C12.2 C14.2 C15.2 C16.2 C17.2 C18.2 C21.2 C22.2 C25.2 C27.2 C30.2 H1.2 J4.3 J5.4 J7.2 R6.2 R7.2 R10.2 R11.1 R12.1 R14.1 R15.1 R17.1 R18.3 TP3.TP U2.2 U2.4 U5.10 U5.17 U5.28 U5.40 U6.9 U6.25 U6.46 U6.64 U6.82 U6.100 U6.116 U6.136 Y1.1 Y1.4 | length 659.4
  Top Layer w0.3: C12.2@46.02,15.67 U6.25 52.08,15.67 55.67,12.08 U6.46 C16.2@55.67,5.02 ; C14.2@46.02,23.67 U6.9 ; U6.136 C18.2@55.17,32.82 ; C21.2 U6.64 v1(64.67,10.76) 68.58,14.67 U6.82 C25.2@73.82,14.67 ; C22.2@65.17,32.77 U6.116 65.17,27.5 v1(69,23.67) ; v1@69.29,23.67 U6.100 C27.2@73.82,23.67
  Top Layer w0.5: TP3.TP U2.4 U2.2 15.733,60.772 18.397,60.772 C8.2 22.86,60.905 ; J5.4 25.4,10.85 28.32,13.77 42.78,13.77 44.58,15.57 C12.2 C12.2@46.02,15.67 ; C14.2@46.02,23.67 C14.2 41.03,23.57 Y1.4 ; C15.2 49.1,50.193 47.407,48.5 22.86,48.5 ; U5.10 49.2,61.875 49.075,62 ; C17.2 54.466,62.004 51.678,62.004 U5.17 49.075,62 ; C18.2@55.17,32.82 C18.2 ; C16.2@55.67,5.02 C16.2 55.57,3.81 56.84,2.54 63.4,2.54 64.67,3.81 C21.2 ; v1(63.63,92.58) R7.2 R6.2 55.75,92.58 52.19,89.02 52.19,82.296 ; C22.2@65.17,32.77 C22.2 65.02,34.21 63.67,35.56 56.44,35.56 55.27,34.39 C18.2 ; R10.2 68.58,79.39 65.674,82.296 52.19,82.296 ; C25.2@73.82,14.67 C25.2 ; C27.2@73.82,23.67 C27.2 73.92,30.54 76.49,33.11 R11.1 R12.1 119.29,33.11 124.46,27.94 124.46,16.975 134.255,7.18 135.73,7.18 138.27,7.18 140.81,7.18 144.5,7.18 151.32,7.18 162,17.86 R18.3 97.5,80.5 90.06,87.94 H1.2 ; 22.86,48.5 22.86,60.905 ; 22.86,48.5 J4.3 37,29.04 Y1.1 Y1.4 ; 22.86,60.905 22.86,68.25 24.61,70 26.31,70 34.98,61.33 C9.2 36.956,61.204 40.326,61.204 45.204,61.204 46,62 ; Y1.4 41,30.99 42.93,32.92 C18.2 ; 46,62 U5.28 46,68.95 46.62,69.57 C11.2 51.217,71.12 52.19,72.093 J7.2 52.19,82.296 ; 46,62 49.075,62
  Bottom Layer w0.3: v1(64.67,10.76) 64.67,19.67 68.555,23.555
  Bottom Layer w0.5: v1(63.63,92.58) 67.31,88.9 89.648,88.9 90.1,89.352 C30.2 ; 68.555,23.555 68.885,23.555 v1(69,23.67) ; H1.2 90.08,93.98 C30.2@90.08,91.02
5VBUS: C5.2 C6.2 C23.2 E1.2 J4.1 R1.2 R8.1 TP4.TP U1.3 U2.3 U3.12 U8.5 | length 175.7
  Top Layer w0.3: v1(15.6,73.34) 17.844,73.34 18.479,73.975 U3.12 ; R8.1 66.19,54.98 67.565,56.355 68.155,56.355 C23.2
  Top Layer w0.5: TP4.TP@2.54,65.72 5.385,65.72 7.25,67.585 R1.2 7.28,70.83 7.28,71.982 8.638,73.34 v1(15.6,73.34) ; v1(12.717,55.32) U1.3 C5.2 18.15,56.707 18.443,57 20.5,57 22,55.5 22,49.22 v1(19.89,47.11) 17.78,45 J4.1 ; v1(12.781,62.94) C6.2@18.458,62.94 ; E1.2 v1(14.437,88.326) ; v1(31,45) 35,45 39.814,40.186 69.186,40.186 72.136,43.136 v1(72.136,43.18) ; R8.1 R8.1@66.365,55.305 ; U8.5 68.463,59.89 68.58,59.772 68.58,57 68.8,56.78 70.154,56.78 70.934,56 v1(71,56)
  Bottom Layer w0.5: v1(12.717,55.32) 12.749,55.352 12.749,62.908 v1(12.781,62.94) 12.781,66.69 12.7,66.771 12.7,70.44 v1(15.6,73.34) 15.6,87.163 v1(14.437,88.326) ; v1(19.89,47.11) 22,45 v1(31,45) ; v1(71,56) 72.136,54.864 v1(72.136,43.18)
BNT0: R12.2 U5.8 U10.1 U10.3 | length 94.8
  Top Layer w0.3: v1(46.25,51.331) 46.25,51.39 47.074,52.214 47.361,52.214 47.473,52.326 47.573,52.426 47.573,56.299 U5.8 ; v1(53.059,47.295) 53.125,47.229 53.378,47.229 53.47,47.136 60.486,47.136 60.904,46.718 60.904,46.096 v1(61,46) ; v1(109.728,31.31) R12.2 U10.1 U10.3
  Bottom Layer w0.3: v1(46.25,51.331) 46.25,49.758 48.722,47.286 53.05,47.286 v1(53.059,47.295) ; v1(61,46) 61,45.962 61.582,45.38 61.582,45.168 76.21,30.54 108.958,30.54 v1(109.728,31.31)
BNT1: R11.2 U5.9 U9.1 U9.3 | length 76.5
  Top Layer w0.3: v1(47.473,51) 48.124,51.651 48.124,54.231 48.4,54.507 U5.9 ; v1(53.739,48) 53.743,48.004 60.502,48.004 v1(60.506,48.008) ; v1(94.488,31.31) R11.2 U9.1 U9.3
  Bottom Layer w0.3: v1(47.473,51) 50.468,48.005 53.734,48.005 v1(53.739,48) ; v1(60.506,48.008) 68.648,39.866 68.648,39.356 76.694,31.31 v1(94.488,31.31)
CLK_50MHZ: U6.18 Y1.3 | length 8.5
  Top Layer w0.3: Y1.3 43.566,18.46 44.276,19.17 U6.18
CTS#: TP5.TP U3.6 U5.32 | length 56
  Top Layer w0.3: U3.6@17.844,86.313 17.844,89.815 v1(24.13,96.102) TP5.TP ; v1(38.1,85.13) 38.1,73.789 42.8,69.089 U5.32
  Bottom Layer w0.3: v1(24.13,96.102) 24.779,95.453 24.779,93.077 27.432,90.424 37.338,90.424 38.1,89.662 v1(38.1,85.13)
EN_BNT: R15.2 S1.1 U5.25 | length 161.3
  Top Layer w0.3: U5.25 48.4,65.763 48.919,65.243 v1(48.919,65.138) ; v1(52.871,52) 68.785,52 77.097,43.688 146.938,43.688 v1(147,43.75) ; R15.2 140.29,8.94 S1.1
  Bottom Layer w0.3: v1(48.919,65.138) 48.919,65.117 49.54,64.496 49.54,54.218 51.758,52 v1(52.871,52) ; S1.1 146.812,15.92 151.892,21 151.892,38.858 v1(147,43.75)
EN_CHA: C29.1 R16.2 U5.26 | length 115.2
  Top Layer w0.3: U5.26 47.6,65.167 48.141,64.626 v1(48.141,64.575) ; v1(52.871,51) 68.67,51 76.67,43 134.8,43 138.27,39.53 C29.1 R16.2
  Bottom Layer w0.3: v1(48.141,64.575) 48.172,64.575 49,63.747 49,53.124 51.124,51 v1(52.871,51)
EN_CHB: C28.1 R13.2 U5.27 | length 111.5
  Top Layer w0.3: U5.27 46.8,64.553 47.426,63.927 v1(47.433,63.927) ; v1(52.871,50) 68.753,50 75.065,43.688 76.503,42.25 130.44,42.25 133.19,39.5 R13.2 C28.1
  Bottom Layer w0.3: v1(47.433,63.927) 47.433,52.817 50.25,50 v1(52.871,50)
FT230_N: R4.1 U3.9 | length 4
  Top Layer w0.3: R4.1@13.092,82.216 14.437,82.216 15.783,80.87 U3.9
FT230_P: R5.1 U3.8 | length 4.3
  Top Layer w0.3: R5.1 14.087,84.262 16.119,86.294 16.546,86.294 16.565,86.313 U3.8@16.574,86.313
GND: C1.1 C2.1 C3.1 C4.2 C5.1 C6.1 C7.1 C8.1 C9.1 C10.1 C11.1 C12.1 C13.1 C14.1 C15.1 C16.1 C17.1 C18.1 C19.1 C20.1 C21.1 C22.1 C23.1 C24.1 C25.1 C26.1 C27.1 C28.2 C29.2 C30.1 D1.1 H1.1 H1.16 J1.A1_B12 J1.B1_A12 J1.S1 J1.S2 J1.S3 J1.S4 J2.2 J3.1 J3.2 J5.2 J5.10 J7.3 R2.1 R3.1 R18.1 S1.2 S1.C TP1.TP TP13.TP U1.1 U2.1 U3.5 U3.13 U4.3 U5.6 U5.16 U5.29 U5.39 U6.10 U6.11 U6.17 U6.26 U6.47 U6.54 U6.65 U6.78 U6.83 U6.92 U6.99 U6.115 U6.128 U6.135 U7.2 U9.2 U9.4 U10.2 U10.4 Y1.2 | length 43.9
  Top Layer w0.3: J1.S4 7.33,80.695 7.33,81.515 7.48,81.665 J1.B1_A12 ; J1.S1 7.33,89.035 7.33,88.215 7.48,88.065 J1.A1_B12 ; U3.5@18.468,86.23 18.479,86.22 v1(18.479,84.767) ; U3.13 19.113,81.914 v3(20,82.801) ; v1(43.273,53.285) 44.765,53.285 C10.1 ; v1(50.25,61.06) 50.32,61.13 51.604,61.13 U5.16 ; v1(57.17,4.92) C19.1
  Bottom Layer w0.3: J2.2@10.15,17.15 3.85,17.15 3.85,10.85 20.9,10.85 J5.2
  other v2: 5,5 165,5 5,95 165,95
LCD_BL: U5.15 U7.1 | length 9.8
  Top Layer w0.3: U5.15 51.714,60.44 53.19,60.44 53.695,60.945 v1(57.27,60.945) ; v1(59.9,61.05) U7.1@61.196,61.05
  Bottom Layer w0.3: v1(57.27,60.945) 57.322,60.997 59.848,60.997 v1(59.9,61.05)
LCD_DB4: H1.11 U5.2 | length 123.5
  Top Layer w0.3: v1(42.5,58) 42.5,57.865 42.8,57.565 U5.2
  Bottom Layer w0.3: v1(42.5,58) 42.542,57.958 45.958,57.958 46.75,58.75 46.75,63.606 46.723,63.633 46.723,64.221 46.75,64.248 46.75,81.359 49.641,84.25 113.177,84.25 121.75,92.823 121.75,95.252 120.002,97 113.427,97 112.92,96.493 H1.11
LCD_DB5: H1.12 U5.3 | length 112.8
  Top Layer w0.3: v1(43.273,58.754) 43.273,58.655 43.6,58.329 U5.3
  Bottom Layer w0.3: v1(43.273,58.754) 43.363,58.754 43.699,58.418 45.418,58.418 46.25,59.25 46.25,82.319 48.931,85 111,85 119.32,93.32 119.32,94.555 118.375,95.5 117.5,95.5 116.96,95.5 H1.12
LCD_DB6: H1.13 U5.4 | length 104.9
  Top Layer w0.3: v1(44.103,59.29) 44.103,59.161 44.4,58.864 U5.4
  Bottom Layer w0.3: v1(44.103,59.29) 45.312,59.29 45.79,59.768 45.79,82.896 48.474,85.58 109.58,85.58 H1.13
LCD_DB7: H1.14 U5.5 | length 111.2
  Top Layer w0.3: v1(45,60) 45,59.865 45.2,59.665 U5.5
  Bottom Layer w0.3: v1(45,60) 45,83.122 47.918,86.04 108.54,86.04 114.194,91.694 114.194,95.194 115,96 119.502,96 120.478,95.024 120.478,94.062 H1.14
LCD_E: H1.6 U5.38 | length 86.9
  Top Layer w0.3: U5.38 40.337,62.789 43.589,62.789 v1(43.6,62.778)
  Bottom Layer w0.3: v1(43.6,62.778) 43.735,62.778 44.103,63.146 44.222,63.146 44.434,63.358 44.434,83.55 47.384,86.5 96.55,86.5 100.22,90.17 H1.6
LCD_RS: H1.4 U5.36 | length 82.5
  Top Layer w0.3: U5.36 40.392,64.466 42.655,64.466 v1(42.721,64.532)
  Bottom Layer w0.3: v1(42.721,64.532) 42.8,64.611 42.8,84.57 45.731,87.5 94.964,87.5 95.14,87.676 H1.4
LCD_RW: H1.5 U5.37 | length 84.9
  Top Layer w0.3: U5.37 40.399,63.673 43.2,63.673 v1(43.273,63.747)
  Bottom Layer w0.3: v1(43.273,63.747) 43.273,63.759 43.974,64.46 43.974,78.805 43.974,84.614 46.36,87 96,87 97.68,88.68 H1.5
MODE0: U5.35 U6.24 | length 72.5
  Top Layer w0.3: v1(33,65.094) 33.053,65.147 40.273,65.147 U5.35 ; U6.24 52.535,16.17 53.035,15.67 v1(53.17,15.67)
  Bottom Layer w0.3: v1(33,65.094) 33,30.32 47.32,16 47.65,15.67 v1(53.17,15.67)
MODE1: U5.12 U6.27 | length 59.7
  Top Layer w0.3: U6.27 v1(51.67,14.67) ; U5.12 51.699,57.975 52.61,57.975 53.585,57 v1(59.5,57)
  Bottom Layer w0.3: v1(51.67,14.67) 57.608,14.67 59.5,16.562 v1(59.5,57)
NetC2_2: C2.2 E1.1 J1.A4_B9 J1.B4_A9 | length 14.1
  Top Layer w0.3: J1.A4_B9@7.477,87.105 7.613,87.241 8.638,87.241 9.21,87.813 9.722,88.326 E1.1@10.711,88.326 ; J1.B4_A9@7.613,82.441 7.739,82.315 8.749,82.315 9.064,82 v1(9.09,82) ; E1.1 11.197,86.367 C2.2
  Bottom Layer w0.3: v1(9.09,82) 9.199,82 10,82.801 10,87.023 v1(9.205,87.818)
NetC4_1: C4.1 U3.3 U3.10 U3.11 | length 9.1
  Top Layer w0.3: C4.1 17.209,78.948 U3.10 U3.11 17.844,82.435 19.749,84.34 U3.3@19.749,86.313
NetC10_2: C10.2 U5.7 | length 3.1
  Top Layer w0.3: C10.2 46.8,53.52 U5.7
NetC24_2: C24.2 R9.2 R10.1 | length 4.6
  Top Layer w0.3: R9.2 C24.2 R10.1
NetD1_2: D1.2 R1.1 | length 2
  Top Layer w0.3: D1.2 R1.1
NetD2_1: D2.1 U5.34 | length 53.7
  Top Layer w0.3: U5.34 38.393,66 33.02,71.373 33.02,85.366 45.844,98.19 D2.1
NetD2_2: D2.2 R6.1 | length 2
  Top Layer w0.3: R6.1 D2.2
NetD3_1: D3.1 U5.13 | length 53
  Top Layer w0.3: U5.13 51.678,58.796 52.662,58.796 53.174,58.284 57.199,58.284 58.42,59.505 58.42,61.92 60.96,64.46 60.96,72.784 64.77,76.594 v1(64.77,80.889) ; D3.1 64.477,98.19 64.77,97.897 v1(64.77,83.54)
  Bottom Layer w0.3: v1(64.77,80.889) v1(64.77,83.54)
NetD3_2: D3.2 R7.1 | length 2
  Top Layer w0.3: R7.1 D3.2
NetH1_3: H1.3 R18.2 | length 75.5
  Top Layer w0.3: H1.3 92.6,91.4 101,83 R18.2
NetH1_15: H1.15 U8.2 | length 85.4
  Top Layer w0.3: U8.2 67.31,62.98 71.5,67.17 71.5,90 78.5,97 120.08,97 H1.15 H1.15@123.067,93.987
NetJ1_A5: J1.A5 R2.2 | length 12.3
  Top Layer w0.3: R2.2@6.713,77.796 5.588,77.796 4.826,78.558 4.826,85.532 5.409,86.115 J1.A5
NetJ1_B5: J1.B5 R3.2 | length 7.5
  Top Layer w0.3: J1.B5 9.308,83.115 9.8,82.623 9.8,79.791 8.749,78.74 R3.2
NetJ4_2: J4.2 U4.5 | length 10
  Top Layer w0.3: U4.5 17.24,34.96 17.919,34.96 18.095,35.136 18.095,40.955 J4.2
NetJ5_1: J5.1 U6.35 | length 33.6
  Top Layer w0.3: J5.1 22.86,5.08 25.4,2.54 v1(41.12,2.54) ; v1(41.03,4.92) 46.78,10.67 U6.35
  Bottom Layer w0.3: v1(41.03,4.92) 41.075,4.875 41.075,2.585 v1(41.12,2.54)
NetJ5_3: J5.3 U6.36 | length 28.6
  Top Layer w0.3: J5.3 25.4,4.6 26.19,3.81 41.12,3.81 47.48,10.17 U6.36
NetJ5_5: J5.5 U6.33 | length 27.1
  Top Layer w0.3: J5.5 27.981,6.309 27.981,5.342 28.751,4.572 39.252,4.572 v1(41.03,6.35) ; v1@41,8.901 43.769,11.67 U6.33
  Bottom Layer w0.3: v1(40.995,8.895) 41.018,8.872 41.018,6.362 v1(41.03,6.35)
NetJ5_9: J5.9 U6.34 | length 18.2
  Top Layer w0.3: J5.9 39.76,6.35 44.58,11.17 U6.34
NetJ6_1: J6.1 U5.23 | length 33.6
  Top Layer w0.3: v1(42,74.231) v1(48.395,74.231) ; U5.23 50,66.675 50.376,66.3 v1(50.446,66.3)
  Bottom Layer w0.3: J6.1 25.615,73.975 41.609,73.975 41.865,74.231 v1(42,74.231) ; v1(48.395,74.231) 50.454,72.172 50.454,66.308 v1(50.446,66.3)
NetJ6_2: J6.2 U5.24 | length 33.7
  Top Layer w0.3: v1(42,73.1) v1(48.395,73.1) ; U5.24 49.2,66.303 49.65,65.853 v1(49.65,65.763)
  Bottom Layer w0.3: J6.2 26.18,72 40.9,72 v1(42,73.1) ; v1(48.395,73.1) 49.65,71.846 v1(49.65,65.763)
NetJ6_3: J6.3 U5.41 | length 19
  Top Layer w0.3: J6.3 26.57,68.68 35.65,59.6 37.465,59.6 38.265,60.4 U5.41
NetJ6_4: J6.4 U5.43 | length 18
  Top Layer w0.3: J6.4 26.2,66.14 33.54,58.8 U5.43
NetJ6_5: J6.5 U5.44 | length 17.2
  Top Layer w0.3: J6.5 25.474,63.526 26.084,63.526 31.61,58 U5.44
NetJ6_6: J6.6 U5.1 | length 26.5
  Top Layer w0.3: J6.6@25.4,61.315 25.4,56.83 29.988,52.243 41,52.243 42,53.243 U5.1
NetJ7_1: J7.1 R9.1 U5.18 | length 36.1
  Top Layer w0.3: U5.18 54.436,62.8 54.458,62.778 v1(57.27,62.778) ; v1(63.63,69.088) 65.902,69.088 R9.1
  Bottom Layer w0.3: J7.1 58.562,69.088 v1(63.63,69.088) 63.63,66.744 59.636,62.75 57.298,62.75 v1(57.27,62.778)
NetJ7_4: J7.4 U5.21 | length 18.5
  Top Layer w0.3: U5.21 55.951,65.2 58.285,67.534 58.285,72.085 57.27,73.1 J7.4
NetJ7_5: J7.5 U5.22 | length 19.6
  Top Layer w0.3: U5.22 55.83,66 57,67.17 v1(57,68) ; J7.5 59.855,77.955 59.855,68.045 v1(59.9,68)
  Bottom Layer w0.3: v1(57,68) v1(59.9,68)
NetR8_2: R8.2 U8.4 | length 3.6
  Top Layer w0.3: R8.2 66.04,59.6 66.3,59.86 66.63,59.86 U8.4
NetR13_1: R13.1 R14.2 S1.B | length 30.5
  Top Layer w0.3: R13.1 133.23,35.08 133.23,33.77 135.29,31.71 135.29,20.75 132.5,17.96 132.5,15.5 138,10 R14.2
NetR16_1: R16.1 R17.2 S1.A | length 27.2
  Top Layer w0.3: R16.1 140.81,33 140.29,32.48 S1.A 140.29,20.71 142.25,18.75 R17.2
NetU7_3: U7.3 U8.3 | length 4.2
  Top Layer w0.3: U7.3 64.21,60.4 65.84,62.03 U8.3
OUT: J2.1 J3.5 J3.6 U4.4 | length 38.4
  Top Layer w0.3: J2.1 7,18 2.54,22.46 2.54,32.54 4.08,34.08 5,34.08 5,36.62 5.185,36.62 5.595,36.21 U4.4
OUT_SIGN_LOG: U4.2 U6.37 | length 56.6
  Top Layer w0.3: U4.2 20.004,35.56 26.416,29.148 v1(26.416,15.748) ; v1(45.72,6.35) 51.053,6.35 51.17,6.467 U6.37
  Bottom Layer w0.3: v1(26.416,15.748) 40.968,15.748 45.72,10.996 v1(45.72,6.35)
RTS#: TP7.TP U3.2 U5.31 | length 61.6
  Top Layer w0.3: U3.2@20.384,86.313 20.389,86.318 20.389,88.833 22.996,91.44 30.48,91.44 34.29,95.25 v1(34.29,96.102) TP7.TP ; v1(39.408,85.13) 39.408,73.281 43.6,69.089 U5.31
  Bottom Layer w0.3: v1(34.29,96.102) 34.29,93.98 35.56,92.71 39.37,92.71 41.656,90.424 41.656,84.118 41.208,83.67 39.977,83.67 39.408,84.239 v1(39.408,85.13)
RXD: TP6.TP U3.4 U5.30 | length 57.9
  Top Layer w0.3: U3.4@19.114,86.313 19.114,89.182 22.642,92.71 27.94,92.71 29.21,93.98 v1(29.21,96.102) TP6.TP ; v1(40.64,85.13) 40.64,72.821 44.4,69.061 U5.30
  Bottom Layer w0.3: v1(29.21,96.102) 29.21,93.98 31.75,91.44 39.37,91.44 40.64,90.17 v1(40.64,85.13)
SPI_MISO: TP10.TP U5.20 U6.21 | length 68.5
  Top Layer w0.3: TP10.TP 48.933,45.537 48.933,43.761 49.109,43.585 52.866,43.585 54.515,41.936 v1(54.515,40.999) ; U6.21 56.278,17.67 56.5,17.892 v1(56.5,18.527) ; U5.20 51.684,64.41 55.644,64.41 v1(55.654,64.42)
  Bottom Layer w0.3: v1(55.654,64.42) 55.654,42.941 55.204,42.491 54.515,41.801 v1(54.515,40.999) 54.515,21.543 56.5,19.558 v1(56.5,18.527)
SPI_MOSI: TP11.TP U5.11 U6.22 | length 51
  Top Layer w0.3: U6.22 56.86,17.17 57.365,17.675 57.365,18.395 v1(57.461,18.491) ; U5.11 50.704,56.326 51.92,55.11 51.92,46.585 52.854,45.651 53.739,45.651 53.739,44.431 55.5,42.67 v1(55.5,40.999)
  Bottom Layer w0.3: v1(55.5,40.999) 55.5,21.34 57.461,19.379 v1(57.461,18.491)
SPI_NSS: TP12.TP U5.19 U6.23 | length 66.5
  Top Layer w0.3: U6.23 57.3,16.67 58.42,17.791 v1(58.42,18.527) ; U5.19@51.776,63.6 v1(56.5,63.6) ; v1(56.5,41.016) 58.42,42.936 TP12.TP
  Bottom Layer w0.3: v1(56.5,63.6) 56.5,21.478 58.42,19.558 v1(58.42,18.527)
SPI_SCLK: TP9.TP U5.14 U6.20 | length 65.1
  Top Layer w0.3: TP9.TP 42.93,45.47 42.93,43.585 45.454,41.061 v1(53.506,41.061) ; U6.20 55.083,18.17 55.44,18.527 v1(55.5,18.527) ; U5.14@51.675,59.6 52.898,59.6 v1(53.5,59)
  Bottom Layer w0.3: v1(53.5,59) 53.591,59 55.17,57.421 55.17,43.994 53.506,42.33 53.506,40.999 53.506,21.664 55.5,19.67 v1(55.5,18.527)
TXD: TP8.TP U3.1 U5.33 | length 66
  Top Layer w0.3: U3.1@21.019,86.313 21.019,88.329 22.86,90.17 34.264,90.17 39.408,95.315 v1(39.408,96.102) ; v1(36.83,85.13) 36.83,74.231 42,69.061 U5.33 ; v1@39.37,96.102 TP8.TP
  Bottom Layer w0.3: v1(36.83,85.13) 36.83,83.82 37.528,83.122 41.472,83.122 42.164,83.814 42.164,91.186 39.408,93.942 v1(39.408,96.102)
USBC_N: C1.2 J1.A7 J1.B7 R4.2 | length 9.4
  Top Layer w0.3: J1.B7 6.713,85.615 6.538,85.439 6.538,84.791 6.713,84.615 J1.A7 8.638,84.615 10.671,82.582 10.926,82.582 R4.2@11.292,82.216 ; C1.2@11.43,80.336 R4.2@11.43,82.003
USBC_P: C3.2 J1.A6 J1.B6 R5.2 | length 17.5
  Top Layer w0.3: v1(5.842,84.091) 5.866,84.115 J1.B6 ; J1.A6 9.19,85.115 9.199,85.091 v1(9.199,86.091) ; 9.215,85.075 10.028,84.262 R5.2@11.142,84.262 ; R5.2 11.717,83.837 11.717,83.305 12.177,82.845 12.177,80.94 12.717,80.4 C3.2@13.865,80.4
  Bottom Layer w0.3: v1(5.842,84.091) 5.842,85.915 6.018,86.091 v1(9.199,86.091)
pads on no net: H1.7 H1.8 H1.9 H1.10 H1.MH1 H1.MH2 H1.MH3 H1.MH4 J1. J1.A8 J1.B8 J3.3 J3.4 J5.6 J5.7 J5.8 J7.6 S1. U3.7 U3.14 U3.15 U3.16 U4.1 U5.42 U6.1 U6.2 U6.3 U6.4 U6.5 U6.6 U6.7 U6.8 U6.12 U6.13 U6.14 U6.15 U6.16 U6.28 U6.29 U6.30 U6.31 U6.32 U6.38 U6.39 U6.40 U6.41 U6.42 U6.43 U6.44 U6.45 U6.48 U6.49 U6.50 U6.51 U6.52 U6.53 U6.55 U6.57 U6.58 U6.59 U6.60 U6.61 U6.62 U6.63 U6.66 U6.67 U6.68 U6.69 U6.70 U6.71 U6.72 U6.73 U6.74 U6.75 U6.76 U6.77 U6.79 U6.80 U6.81 U6.84 U6.85 U6.86 U6.87 U6.88 U6.89 U6.91 U6.93 U6.94 U6.95 U6.96 U6.97 U6.98 U6.101 U6.102 U6.103 U6.104 U6.105 U6.106 U6.107 U6.108 U6.109 U6.110 U6.111 U6.112 U6.113 U6.114 U6.117 U6.118 U6.119 U6.120 U6.121 U6.122 U6.123 U6.124 U6.125 U6.127 U6.129 U6.130 U6.131 U6.132 U6.133 U6.134 U6.137 U6.138 U6.139 U6.140 U6.141 U6.142 U6.143 U6.144 U8.1

## Polygon pours and split planes (outlines as drawn)
GND on Bottom Layer "GND_L02_P001" (solid, pour order 1): 0,100 0,0 170,0 170,100
GND on Top Layer "GND_L01_P000" (solid, remove dead copper, pour order 0): 0,100 170,100 170,0 0,0

## Other copper
Multi-Layer:
  pour cut-out: 1.5,19.5 1.5,8.5 12.5,8.5 12.5,19.5

## Silkscreen, mask and mechanical layers (free items; w line width, h text height)
Top Overlay:
  text "CTS#" at 22.2,94.307 h1.1
  text "RXD" at 27.36,94.18 h1.1
  text "RTS#" at 32.2,94.18 h1.1
  text "TXD" at 38.058,93.964 h1.1
  text "MCU conn." at 50.419,74.549 h1.52
  text "5V" at 5.642,64.267 h1.5 r90
  text "3V3" at 5.737,58.54 h1.5 r90
  text "1V8" at 5.985,50.92 h1.5 r90
  text "GND" at 6.05,43.48 h1.5 r90
  text "SCLK" at 41.069,42.872 h1.1
  text "MISO" at 46.45,42.872 h1.1
  text "MOSI" at 52.016,42.872 h1.1
  text "NSS" at 57.096,42.872 h1.1
  text "1815C_GenerateurSignauxLogProg_MLI" at 168.343,29.41 h1.1 r90
  text "CPLD conn." at 23.695,13.535 h1.1
  text "GND" at 83.385,2.105 h1.1
Bottom Overlay:
  text "1815C_GenerateurSignauxLogProg_MLI" at 168.343,68.38 h1.1 r90
Outline:
  the board outline again, w0.254

## Dimensions
0,0 to 170,0 on Top Dimensions (Mech11)
0,0 to 0,100 on Top Dimensions (Mech11)

## Text inside footprints (layer, text, board x,y; h text height)
J5: Top Overlay "1" at 20.955,5.715 h1.27; Top 3D Body "10" at 34.45,8.155 h1.27; Top 3D Body "1" at 20.955,5.715 h1.27
U3: Top Overlay "*" at 21.246,86.884 h1.27 r270; Top 3D Body "*" at 19.952,85.522 h1.27 r270
U5: Top Overlay "*" at 41.4,54.7 h1.27 r90; Top 3D Body "*" at 42.235,57.06 h1.27 r90
U8: Top Overlay "*" at 68.31,63.26 h1.27 r270; Top 3D Body "*" at 67.069,61.57 h1.27 r270
U9: Top Overlay "*" at 95.75,26.214 h1.27; Top 3D Body "*" at 97.135,24.69 h1.27
U10: Top Overlay "*" at 110.99,26.214 h1.27; Top 3D Body "*" at 112.375,24.69 h1.27